# Altium PCB dipext-pin_r3.PcbDoc
Units mil, origin at the board's own origin, x right, y up, seen from the top; angles counter-clockwise.
Board outline 1500 x 3000 mil, 2 copper layers (Top Layer, Bottom Layer); 2 components, 40 nets, 80 pads, 0 vias.
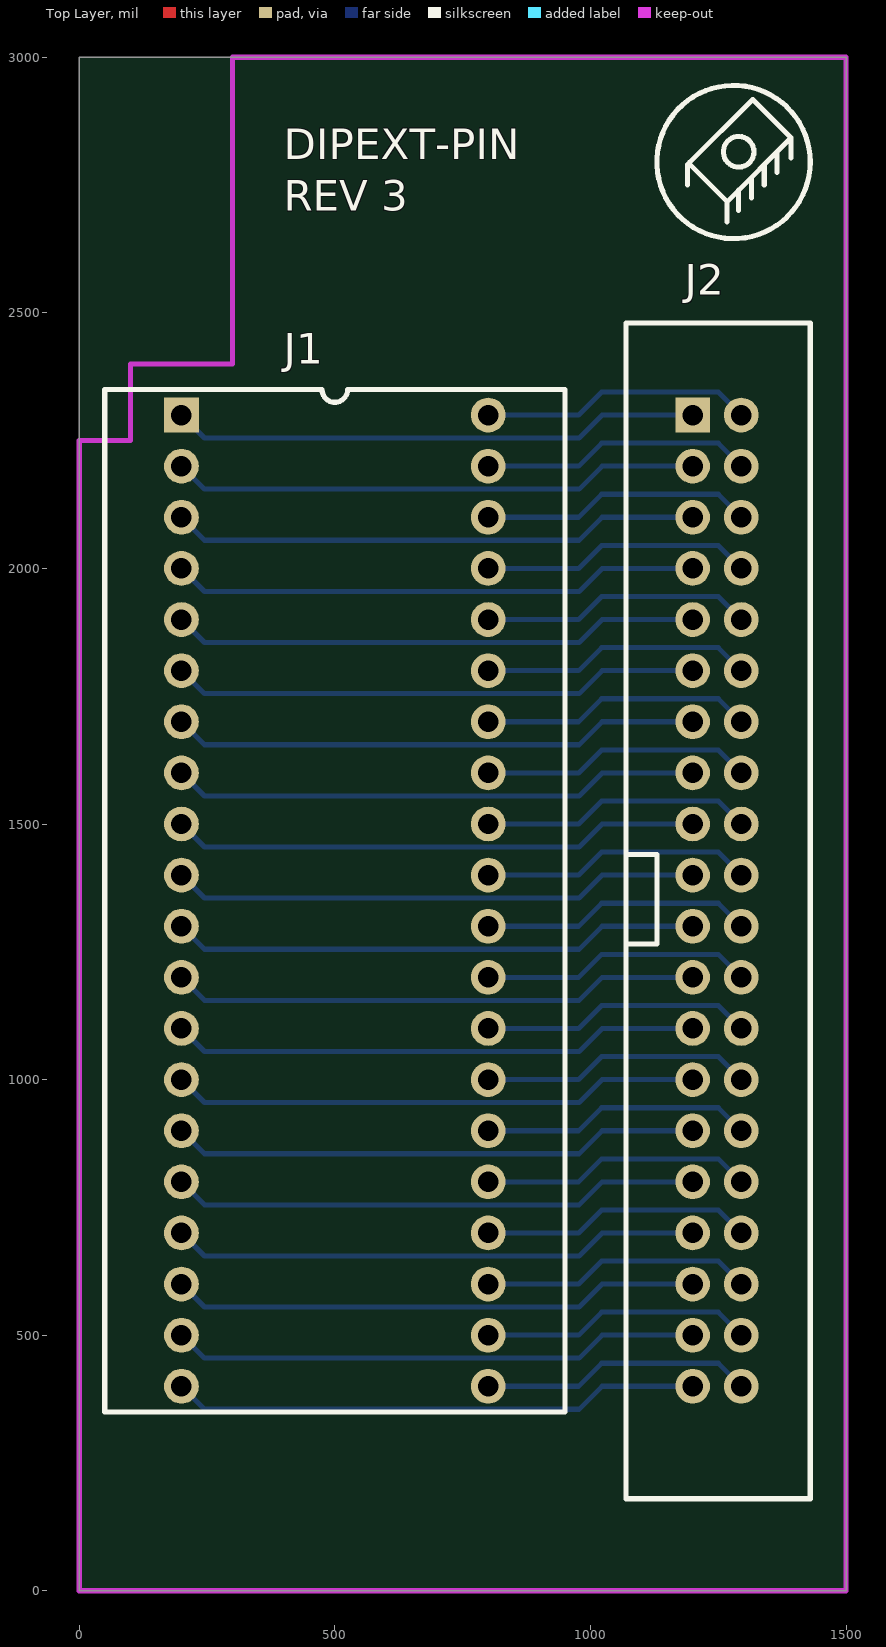
[diagram p0: Top Layer view]
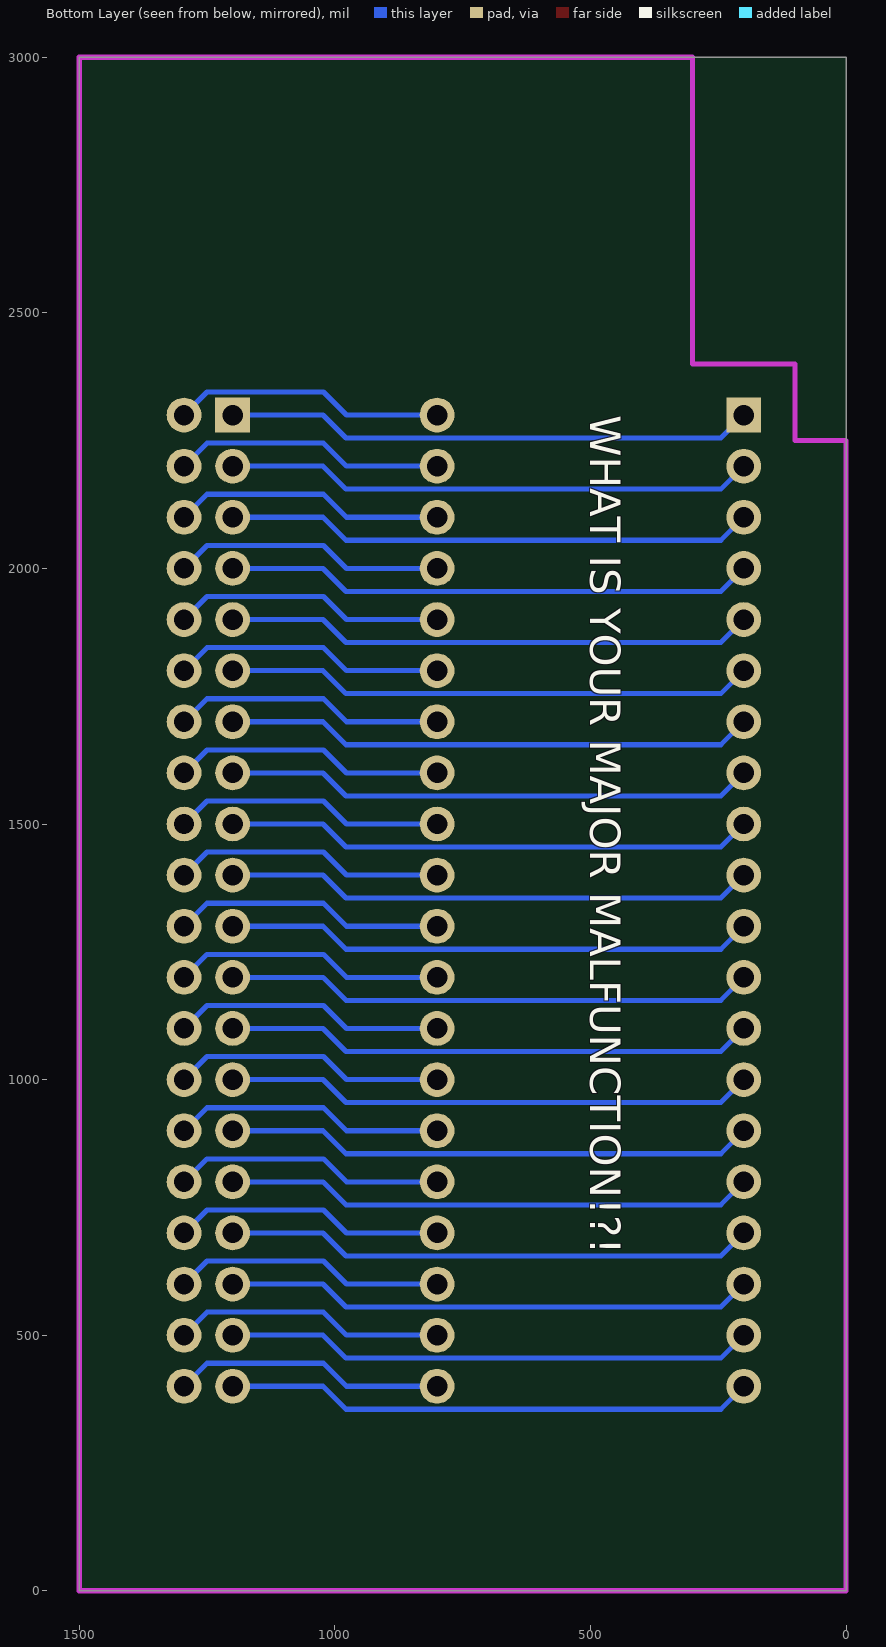
[diagram p1: Bottom Layer view, seen from below]

## Layer stack, top to bottom
Top Solder: solder mask 0.4, Solder Resist, Dk 3.5
Top Layer: signal copper 1.4
Dielectric 1: dielectric 12.6, FR-4, Dk 4.8
Bottom Layer: signal copper 1.4
Bottom Solder: solder mask 0.4, Solder Resist, Dk 3.5

## Board outline
0,0 1500,0 1500,3000 0,3000

## Design rules (kind name [scope] priority, off if disabled: settings)
Clearance [All] p1: gap=10
PolygonConnect [All] p1: connectstyle=Relief reliefconductorwidth=10 reliefentries=4 polygonreliefangle="90 Angle" airgapwidth=10
RoutingVias [All] p1: holewidth=28 width=50 viastyle="Through Hole" minholewidth=28 minwidth=50 maxholewidth=28 maxwidth=50
SolderMaskExpansion [All] p1: expansion=4
Width [All] p1: maxlimit=10 minlimit=10 preferedwidth=10
30 further rules are at their usual default settings.

## Components (designator, comment, footprint, x,y, rotation, side; value= is the part's Value field where it differs from the comment)
J1 "DIPF40" DIPF40 200,2300 r0 top
J2 "IDC40" IDC40 1070,2480 r0 top

## Footprints (in the part's own frame and the unit in brackets; to place one, negate y for a bottom-side part, rotate by r counter-clockwise, add the part's x,y. Pads: shape width x height; smd on the part's side, far side on the other; paste and mask are expansions set on the pad)
DIPF40 [mil]
  rect 68x68 hole 40: 1(0,0)
  round 68 hole 40: 2(0,-100) 3(0,-200) 4(0,-300) 5(0,-400) 6(0,-500) 7(0,-600) 8(0,-700) 9(0,-800) 10(0,-900) 11(0,-1000) 12(0,-1100) 13(0,-1200) 14(0,-1300) 15(0,-1400) 16(0,-1500) 17(0,-1600) 18(0,-1700) 19(0,-1800) 20(0,-1900) 21(600,-1900) 22(600,-1800) 23(600,-1700) 24(600,-1600) 25(600,-1500) 26(600,-1400) 27(600,-1300) 28(600,-1200) 29(600,-1100) 30(600,-1000) 31(600,-900) 32(600,-800) 33(600,-700) 34(600,-600) 35(600,-500) 36(600,-400) 37(600,-300) 38(600,-200) 39(600,-100) 40(600,0)
  silkscreen extent -150,-1950 750,50
IDC40 [mil]
  rect 68x68 hole 40: 1(130,-180)
  round 68 hole 40: 2(225,-180) 3(130,-280) 4(225,-280) 5(130,-380) 6(225,-380) 7(130,-480) 8(225,-480) 9(130,-580) 10(225,-580) 11(130,-680) 12(225,-680) 13(130,-780) 14(225,-780) 15(130,-880) 16(225,-880) 17(130,-980) 18(225,-980) 19(130,-1080) 20(225,-1080) 21(130,-1180) 22(225,-1180) 23(130,-1280) 24(225,-1280) 25(130,-1380) 26(225,-1380) 27(130,-1480) 28(225,-1480) 29(130,-1580) 30(225,-1580) 31(130,-1680) 32(225,-1680) 33(130,-1780) 34(225,-1780) 35(130,-1880) 36(225,-1880) 37(130,-1980) 38(225,-1980) 39(130,-2080) 40(225,-2080)
  silkscreen extent 0,-2300 360,0

## Part data
J1: "DIP40 ZIF"

## Nets (pads, with @x,y where several pads share a name; then routed paths per layer and width w, separated by ;. In a path a pad name is that pad's centre, name@x,y a point inside that pad or via, vN(x,y) a via of type N, cw(c..) or ccw(c..) an arc to the next point about the centre after c; other vN are vias at no path point)
P1: J1.1 J2.1 | length 1037.3
  Bottom Layer w10: J1.1 245,2255 978,2255 1023,2300 J2.1
P2: J1.2 J2.3 | length 1037.3
  Bottom Layer w10: J1.2 245,2155 978,2155 1023,2200 J2.3
P3: J1.3 J2.5 | length 1037.3
  Bottom Layer w10: J1.3 245,2055 978,2055 1023,2100 J2.5
P4: J1.4 J2.7 | length 1037.3
  Bottom Layer w10: J1.4 245,1955 978,1955 1023,2000 J2.7
P5: J1.5 J2.9 | length 1037.3
  Bottom Layer w10: J1.5 245,1855 978,1855 1023,1900 J2.9
P6: J1.6 J2.11 | length 1037.3
  Bottom Layer w10: J1.6 245,1755 978,1755 1023,1800 J2.11
P7: J1.7 J2.13 | length 1037.3
  Bottom Layer w10: J1.7 245,1655 978,1655 1023,1700 J2.13
P8: J1.8 J2.15 | length 1037.3
  Bottom Layer w10: J1.8 245,1555 978,1555 1023,1600 J2.15
P9: J1.9 J2.17 | length 1037.3
  Bottom Layer w10: J1.9 245,1455 978,1455 1023,1500 J2.17
P10: J1.10 J2.19 | length 1037.3
  Bottom Layer w10: J1.10 245,1355 978,1355 1023,1400 J2.19
P11: J1.11 J2.21 | length 1037.3
  Bottom Layer w10: J1.11 245,1255 978,1255 1023,1300 J2.21
P12: J1.12 J2.23 | length 1037.3
  Bottom Layer w10: J1.12 245,1155 978,1155 1023,1200 J2.23
P13: J1.13 J2.25 | length 1037.3
  Bottom Layer w10: J1.13 245,1055 978,1055 1023,1100 J2.25
P14: J1.14 J2.27 | length 1037.3
  Bottom Layer w10: J1.14 245,955 978,955 1023,1000 J2.27
P15: J1.15 J2.29 | length 1037.3
  Bottom Layer w10: J1.15 245,855 978,855 1023,900 J2.29
P16: J1.16 J2.31 | length 1037.3
  Bottom Layer w10: J1.16 245,755 978,755 1023,800 J2.31
P17: J1.17 J2.33 | length 1037.3
  Bottom Layer w10: J1.17 245,655 978,655 1023,700 J2.33
P18: J1.18 J2.35 | length 1037.3
  Bottom Layer w10: J1.18 245,555 978,555 1023,600 J2.35
P19: J1.19 J2.37 | length 1037.3
  Bottom Layer w10: J1.19 245,455 978,455 1023,500 J2.37
P20: J1.20 J2.39 | length 1037.3
  Bottom Layer w10: J1.20 245,355 978,355 1023,400 J2.39
P21: J1.21 J2.40 | length 532.3
  Bottom Layer w10: J1.21 977,400 1022,445 1250,445 J2.40
P22: J1.22 J2.38 | length 532.3
  Bottom Layer w10: J1.22 977,500 1022,545 1250,545 J2.38
P23: J1.23 J2.36 | length 532.3
  Bottom Layer w10: J1.23 977,600 1022,645 1250,645 J2.36
P24: J1.24 J2.34 | length 532.3
  Bottom Layer w10: J1.24 977,700 1022,745 1250,745 J2.34
P25: J1.25 J2.32 | length 532.3
  Bottom Layer w10: J1.25 977,800 1022,845 1250,845 J2.32
P26: J1.26 J2.30 | length 532.3
  Bottom Layer w10: J1.26 977,900 1022,945 1250,945 J2.30
P27: J1.27 J2.28 | length 532.3
  Bottom Layer w10: J1.27 977,1000 1022,1045 1250,1045 J2.28
P28: J1.28 J2.26 | length 532.3
  Bottom Layer w10: J1.28 977,1100 1022,1145 1250,1145 J2.26
P29: J1.29 J2.24 | length 532.3
  Bottom Layer w10: J1.29 977,1200 1022,1245 1250,1245 J2.24
P30: J1.30 J2.22 | length 532.3
  Bottom Layer w10: J1.30 977,1300 1022,1345 1250,1345 J2.22
P31: J1.31 J2.20 | length 532.3
  Bottom Layer w10: J1.31 977,1400 1022,1445 1250,1445 J2.20
P32: J1.32 J2.18 | length 532.3
  Bottom Layer w10: J1.32 977,1500 1022,1545 1250,1545 J2.18
P33: J1.33 J2.16 | length 532.3
  Bottom Layer w10: J1.33 977,1600 1022,1645 1250,1645 J2.16
P34: J1.34 J2.14 | length 532.3
  Bottom Layer w10: J1.34 977,1700 1022,1745 1250,1745 J2.14
P35: J1.35 J2.12 | length 532.3
  Bottom Layer w10: J1.35 977,1800 1022,1845 1250,1845 J2.12
P36: J1.36 J2.10 | length 532.3
  Bottom Layer w10: J1.36 977,1900 1022,1945 1250,1945 J2.10
P37: J1.37 J2.8 | length 532.3
  Bottom Layer w10: J1.37 977,2000 1022,2045 1250,2045 J2.8
P38: J1.38 J2.6 | length 532.3
  Bottom Layer w10: J1.38 977,2100 1022,2145 1250,2145 J2.6
P39: J1.39 J2.4 | length 532.3
  Bottom Layer w10: J1.39 977,2200 1022,2245 1250,2245 J2.4
P40: J1.40 J2.2 | length 532.3
  Bottom Layer w10: J1.40 977,2300 1022,2345 1250,2345 J2.2

## Keep-outs
Keep-Out Layer:
  lines w10: 0,0 1500,0 1500,3000 300,3000 300,2400 100,2400 100,2250 0,2250 0,0

## Silkscreen, mask and mechanical layers (free items; w line width, h text height)
Top Overlay:
  circle w10: c1290,2815 r30
  circle w10: c1280,2795 r150
  lines w10: 1190,2750 1190,2790 ; 1195,2795 1192.5,2792.5 ; 1267.5,2677.5 1267.5,2717.5 ; 1290,2700 1290,2740 ; 1315,2725 1315,2765 ; 1340,2750 1340,2790 ; 1365,2775 1365,2815 ; 1392.5,2802.5 1392.5,2842.5 ; 1192.5,2792.5 1267.5,2717.5 ; 1192.5,2792.5 1317.5,2917.5 1392.5,2842.5 ; 1267.5,2717.5 1392.5,2842.5
  text "DIPEXT-PIN" at 400,2800 h60
  text "REV 3" at 400,2700 h60
Bottom Overlay:
  text "WHAT IS YOUR MAJOR MALFUNCTION!?!" at 500,2300 h60 r90